# Altium PCB ciclo_V1.PcbDoc
Units mil, origin at the board's own origin, x right, y up, seen from the top; angles counter-clockwise.
Board outline 4270 x 2745 mil, 2 copper layers (Top Layer, Bottom Layer); 30 components, 33 nets, 131 pads, 0 vias.
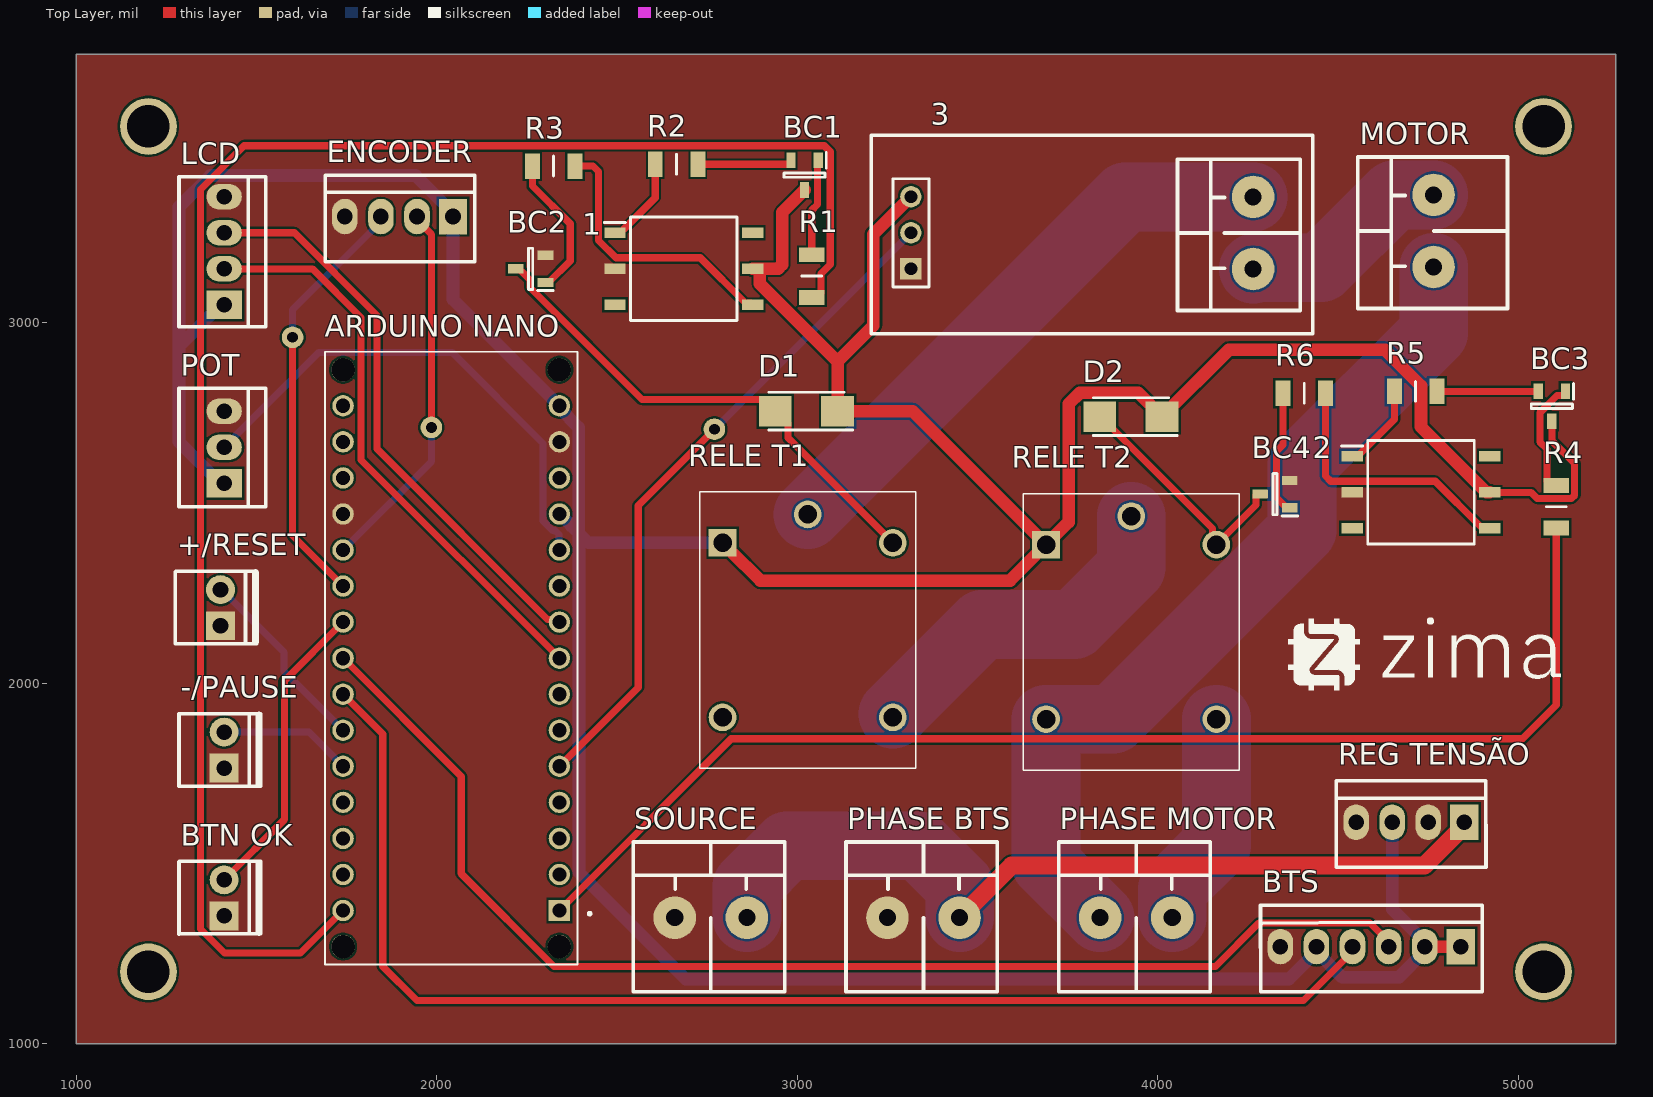
[diagram p0: Top Layer view]
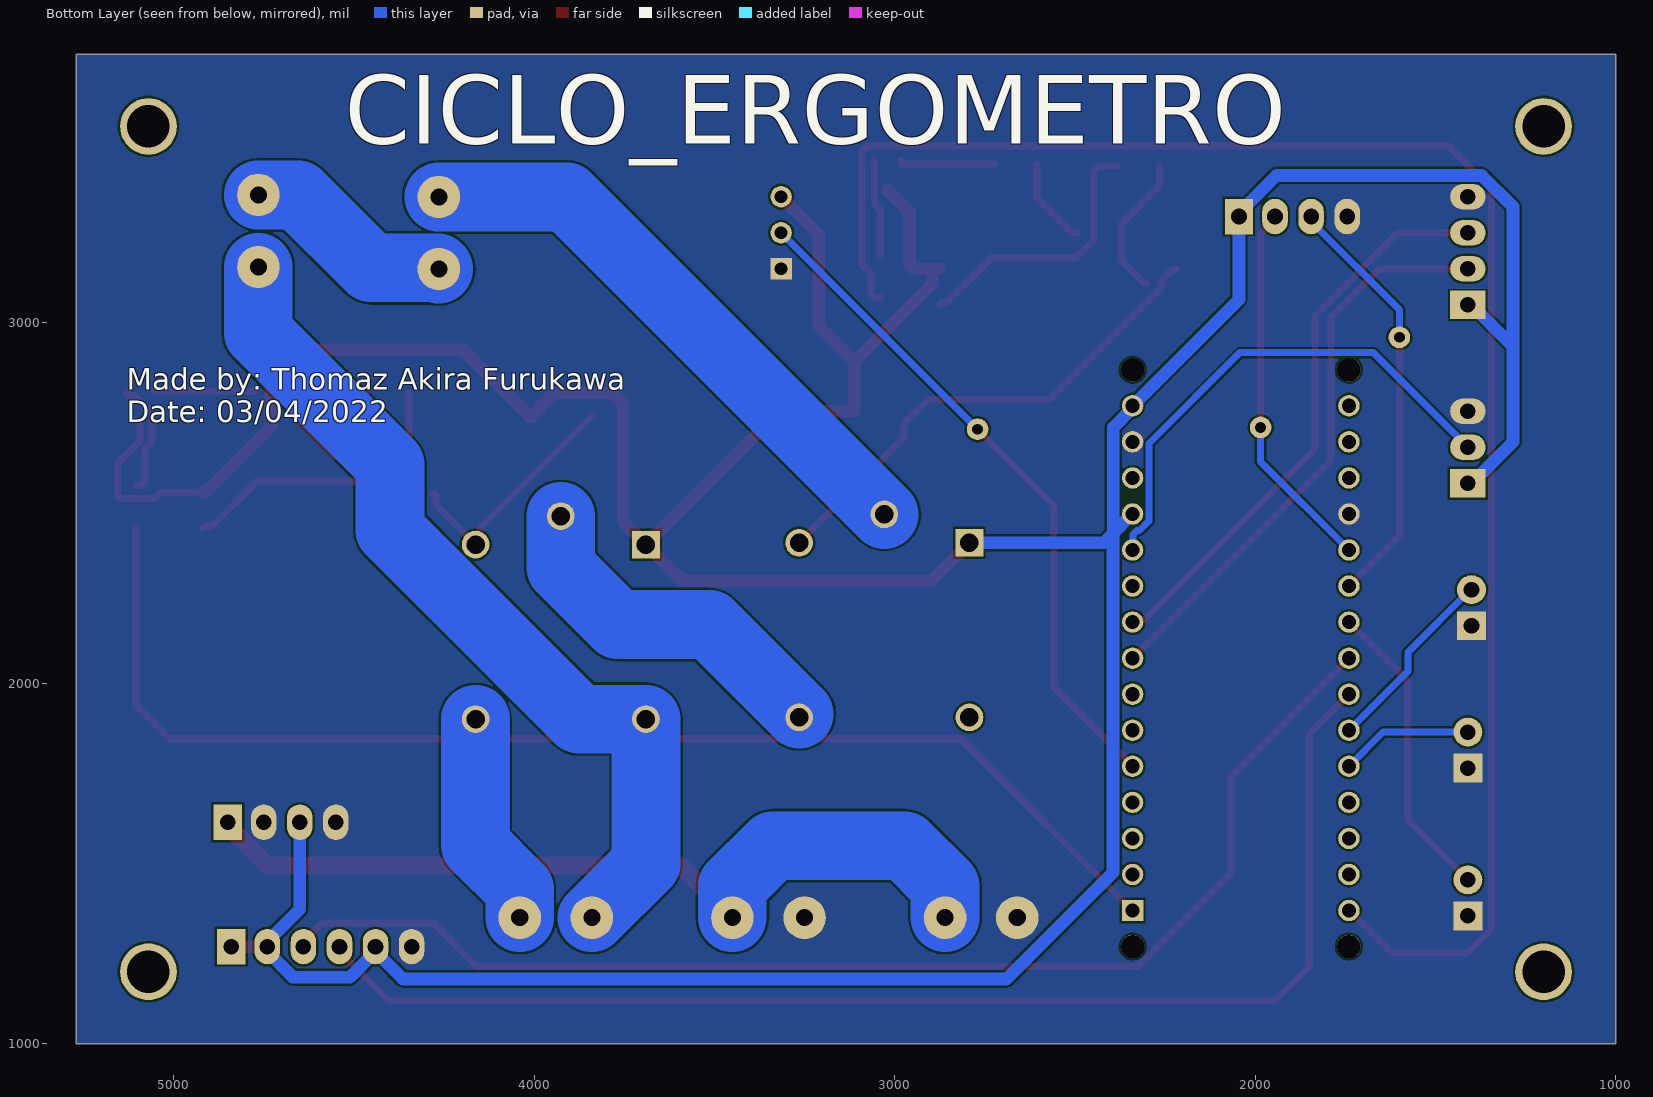
[diagram p1: Bottom Layer view, seen from below]
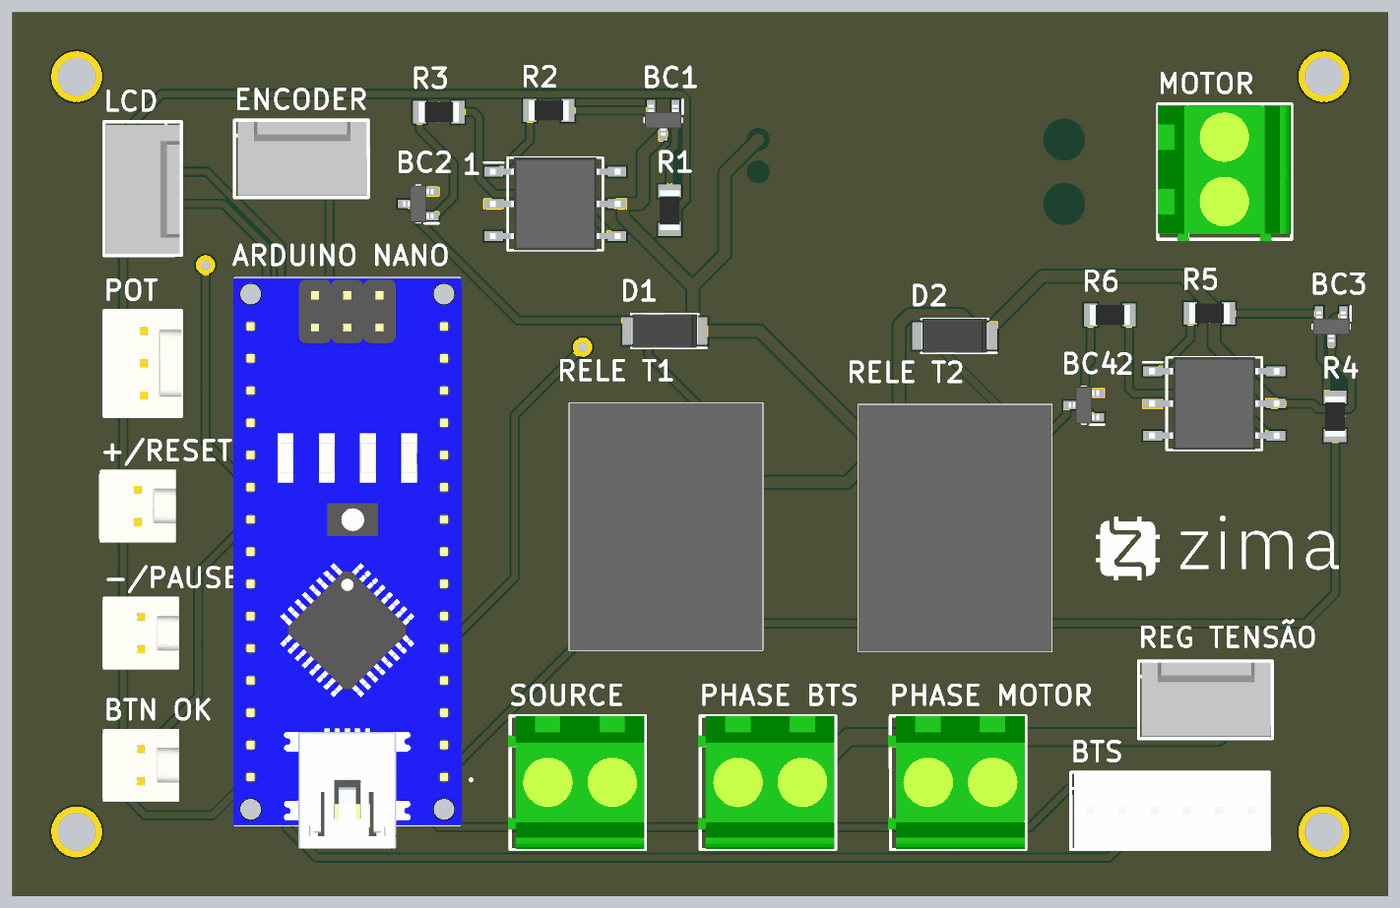
[diagram p2: 3D render of the assembled board from above, using the file's embedded part models]

## Layer stack, top to bottom
Top Solder: solder mask 0.4, Solder Resist, Dk 3.5
Top Layer: signal copper 1.4
Dielectric 1: dielectric 12.6, FR-4, Dk 4.8
Bottom Layer: signal copper 1.4
Bottom Solder: solder mask 0.4, Solder Resist, Dk 3.5

## Board outline
1000,1000 5270,1000 5270,3745 1000,3745

## Design rules (kind name [scope] priority, off if disabled: settings)
Clearance [All] p1: gap=5.98 ignorepadtopadclearanceinfootprint=FALSE except(0: Arc-Hole Track-Hole SMDPad-Hole THPad-Hole Via-Hole Fill-Hole Poly-Hole Region-Hole Text-Hole)
ComponentClearance [All] p1: gap=3.94 collisioncheckmode=3 verticalgap=3.94 showdistances=FALSE
HoleSize [All] p1: absolutevalues=TRUE maxlimit=190 minlimit=1 maxpercent=80.000 minpercent=20.000
MinimumSolderMaskSliver [All] p1: minsoldermaskwidth=3.94
PolygonConnect [All] p1: connectstyle=Direct reliefconductorwidth=10 reliefentries=4 polygonreliefangle="90 Angle" airgapwidth=10
RoutingVias [All] p1: holewidth=15.75 width=31.5 viastyle="Through Hole" minholewidth=11.81 minwidth=23.62 maxholewidth=19.68 maxwidth=39.37
SilkToSilkClearance [All] p1: silktosilkclearance=0
SilkToSolderMaskClearance [IsPad] p1: minsilkscreentomaskgap=0 clearancetoexposedcopper=TRUE
SolderMaskExpansion [All] p1: expansion=3.15 istentingtop=FALSE
Width [All] p1: maxlimit=190.69 minlimit=11.81 preferedwidth=19.68 minimp=50.000000 maximp=50.000000 favimp=50.000000
25 further rules are at their usual default settings.

## Components (designator, comment, footprint, x,y, rotation, side; value= is the part's Value field where it differs from the comment)
1 "4N25-X007T" SOP254P1030X440-6N 2685,3150 r0 top
2 "4N25-X007T" SOP254P1030X440-6N 4730,2530 r0 top
3 "ACS712" ACS712 21275,20890 r90 top
+/RESET "KK_2.54_2vias" KK_2VIAS_180º 1400,2160 r90 top
-/PAUSE "KK_2.54_2vias" KK_2VIAS_180º 1410,1765 r90 top
"ARDUINO NANO" "ABX00028" MODULE_A000005 2040,2070 r180 top (schematic designator "Arduino Nano")
BC1 "Trans BC817" SOT96P240X110-3N 3020,3410 r270 top
BC2 "Trans BC817" SOT96P240X110-3N 2260,3150 r180 top
BC3 "Trans BC817" SOT96P240X110-3N 5092.8,2768.66 r270 top
BC4 "Trans BC817" SOT96P240X110-3N 4325,2525 r180 top
"BTN OK" "KK_2.54_2vias" KK_2VIAS_180º 1410,1355 r90 top
BTS "KK_2.54_6vias" KK_6vias_180° 4840,1270 r180 top
D1 "1N4007 smd" DIOM5327X242N 3025,2755 r180 top
D2 "1N4007 smd" DIOM5327X242N 3925,2740 r180 top
ENCODER "KK_2.54_4vias" KK_4vias_180° 2045,3295 r180 top
LCD "KK_2.54_4vias" KK_4vias_180° 1410,3050 r90 top
MOTOR "KRE2vias" KRE2-2vias 4765,3255 r270 top
"PHASE BTS" "KRE2vias" KRE2-2vias 3350,1350 r180 top (schematic designator "FASE BTS")
"PHASE MOTOR" "KRE2vias" KRE2-2vias 3940,1350 r180 top (schematic designator "FASE MOTOR")
POT "KK_2.54_3vias" KK_3vias_180º 1410,2555 r90 top
R1 "1k" RESC3216X60N 3040,3130 r90 top
R2 "100R" RESC3216X60N 2665,3440 r0 top
R3 "1k" RESC3216X60N 2324.06,3435 r0 top
R4 "1k" RESC3216X60N 5105,2490 r90 top
R5 "100R" RESC3216X60N 4715,2810 r0 top
R6 "1k" RESC3216X60N 4405.94,2805 r0 top
"REG TENSÃO" "KK_2.54_4vias" KK_4vias_180° 4850,1615 r180 top
"RELE T1" "rele T73" JQC3FT731Z12VDC 2792.56,2390 r270 top
"RELE T2" "rele T73" JQC3FT731Z12VDC 3690,2385 r270 top
SOURCE "KRE2vias" KRE2-2vias 2760,1350 r180 top (schematic designator FONTE)

## Footprints (in the part's own frame and the unit in brackets; to place one, negate y for a bottom-side part, rotate by r counter-clockwise, add the part's x,y. Pads: shape width x height; smd on the part's side, far side on the other; paste and mask are expansions set on the pad)
ACS712 [mm]
  rect 1.5x1.5 hole 0.9: 1(-450.596,456.184)
  round 1.5 hole 0.9: 2(-448.056,456.184) 3(-445.516,456.184)
  round 3 hole 1.2: 4(-450.611,432.069) 5(-445.531,432.069)
  silkscreen extent -455.17,427.86 -441.2,458.98
DIOM5327X242N [mm]
  rect 2.3x2.15 smd: 1(-2.2,0) 2(2.2,0)
  silkscreen extent -3.27,-1.34 2.65,1.34, body extent -2.65,-1.33 2.65,1.34, height 2.42
JQC3FT731Z12VDC [mm]
  rect 1.95x1.95 hole 1.3: 1(0,0)
  round 1.95 hole 1.3: 2(-2,6) 3(0,12) 4(12.3,0) 5(12.3,12)
  silkscreen extent -3.6,-1.62 15.9,13.62, body extent -3.6,-1.62 15.9,13.62, height 15.6
KK_2VIAS_180º [mil]
  rect 80x80 hole 43.31: 1(0,0)
  round 80 hole 43.31: 2(100,0)
  silkscreen extent -50,-101 151,125, body extent -61,-108 165,128, height 468
KK_3vias_180º [mm]
  rect 2x2.5 hole 1.1: 1(0,0)
  oval 1.8x2.5 hole 1.1: 2(2.54,0) 3(5.08,0)
  silkscreen extent -1.65,-2.92 6.69,3.18, body extent -1.6,-2.95 6.69,3.05, height 11.9
KK_4vias_180° [mm]
  rect 2x2.5 hole 1.1: 1(0,0)
  oval 1.8x2.5 hole 1.1: 2(2.54,0) 3(5.08,0) 4(7.62,0)
  silkscreen extent -1.53,-2.92 9.02,3.18, body extent -1.4,-2.79 8.76,3.01, height 11.72
KK_6vias_180° [mm]
  rect 2x2.5 hole 1.1: 1(0,0)
  oval 1.8x2.5 hole 1.1: 2(2.54,0) 3(5.08,0) 4(7.62,0) 5(10.16,0) 6(12.7,0)
  silkscreen extent -1.53,-2.92 14.11,3.18, body extent -1.4,-2.79 13.84,3.05, height 11.7
KRE2-2vias [mm]
  round 3 hole 1.2: 1(-2.54,0) 2(2.54,0)
  silkscreen extent -5.21,-5.33 5.46,5.21, body extent -5.13,-5.33 5.63,5.17, height 14.35
MODULE_A000005 [mm]
  rect 1.508x1.508 hole 1: 1(-7.62,17.78)
  round 1.508 hole 1: 2(-7.62,15.24) 3(-7.62,12.7) 4(-7.62,10.16) 5(-7.62,7.62) 6(-7.62,5.08) 7(-7.62,2.54) 8(-7.62,0) 9(-7.62,-2.54) 10(-7.62,-5.08) 11(-7.62,-7.62) 12(-7.62,-10.16) 13(-7.62,-12.7) 14(-7.62,-15.24) 15(-7.62,-17.78) 16(7.62,-17.78) 17(7.62,-15.24) 18(7.62,-12.7) 19(7.62,-10.16) 20(7.62,-7.62) 21(7.62,-5.08) 22(7.62,-2.54) 23(7.62,0) 24(7.62,2.54) 25(7.62,5.08) 26(7.62,7.62) 27(7.62,10.16) 28(7.62,12.7) 29(7.62,15.24) 30(7.62,17.78)
  round 1.651 hole 1.651 unplated: ""(-7.62,20.32) ""(-7.62,-20.32) ""(7.62,20.32) ""(7.62,-20.32)
  silkscreen extent -9.85,-21.59 8.89,21.59, body extent -9,-21.6 9,23.4, height 18.7
RESC3216X60N [mm]
  rect 1.05x1.8 smd: 1(-1.5,0) 2(1.5,0)
  silkscreen extent 0,-0.7 0,0.7, body extent -1.58,-0.8 1.58,0.8, height 0.6
SOP254P1030X440-6N [mm]
  rect 1.5x0.75 smd: 1(-4.85,2.54) 2(-4.85,0) 3(-4.85,-2.54) 4(4.85,-2.54) 5(4.85,0) 6(4.85,2.54)
  silkscreen extent -5.6,-3.65 3.75,3.65, body extent -5.15,-3.65 5.15,3.65, height 4.4
SOT96P240X110-3N [mm]
  rect 1.1x0.65 smd: 1(-1.05,0.96) 2(-1.05,-0.96) 3(1.05,0)
  silkscreen extent -1.6,-1.45 0.15,1.54, body extent -1.2,-1.45 1.2,1.45, height 1.1

## Part data
1 2: "Phototransistor", Manufacturer_Name=Vishay, Mouser Part Number=782-4N25-X007T, Arrow Part Number=4N25-X007T, Arrow Price/Stock=https://www.arrow.com/en/products/4n25-x007t/vishay, Datasheet Link=https://eu.mouser.com/datasheet/2/427/4n25x000-1767213.pdf, Height=4.4mm, Manufacturer_Part_Number=4N25-X007T, Mouser Price/Stock=https://www.mouser.com/Search/Refine.aspx?Keyword=782-4N25-X007T
+/RESET -/PAUSE "BTN OK": "Conector KK 2.54mm 2 vias", Descrição="Conector KK 3 vias com passo 2.54mm", Encapsulamento="PTH - 180º", Modelo="2 vias - 180º", Valor="KK 2 vias 180º"
"ARDUINO NANO": "ATmega4809 Arduino Nano Every AVRÂ® AVR MCU 8-Bit Embedded Evaluation Board", Package=None, Availability="In Stock", Check_prices=https://www.snapeda.com/parts/ABX00028/Arduino/view-part/3656170/?ref=eda, MF=Arduino, MP=ABX00028, Price=None, Purchase-URL=https://pricing.snapeda.com/search/part/ABX00028/?ref=eda, SnapEDA_Link=https://www.snapeda.com/parts/ABX00028/Arduino/view-part/3656170/?ref=snap
BC1 BC2 BC3 BC4: "Transistor BJT NPN BC817-25-7-F", Arrow Part Number=BC817-25-7-F, Manufacturer_Name="Diodes Inc.", Mouser Part Number=621-BC817-25-7-F, Arrow Price/Stock=https://www.arrow.com/en/products/bc817-25-7-f/diodes-incorporated, Datasheet Link=https://www.diodes.com/assets/Datasheets/ds11107.pdf, Height=1.1mm, Manufacturer_Part_Number=BC817-25-7-F, Mouser Price/Stock=https://www.mouser.co.uk/ProductDetail/Diodes-Incorporated/BC817-25-7-F?qs=rGAXPo9uwV0jK0EyLZnqOw%3D%3D
BTS: "Conector KK 2.54mm 6 vias", Descrição="Conector KK 3 vias com passo 2.54mm", Encapsulamento="PTH - 180º", Modelo="3 vias - 180º", Valor="KK 6 vias 180º"
D1 D2: "Diode smd", Manufacturer_Name=Shikues, Manufacturer_Part_Number=1N4007, Datasheet Link=https://datasheet.lcsc.com/szlcsc/SK-1N4007_C126233.pdf, Height=2.42mm
ENCODER LCD "REG TENSÃO": "Conector KK 2.54mm 4 vias", Descrição="Conector KK 3 vias com passo 2.54mm", Encapsulamento="PTH - 180º", Modelo="3 vias - 180º", Valor="KK 4 vias 180º"
MOTOR "PHASE BTS" "PHASE MOTOR" SOURCE: "Conector 2 vias", Descrição="Conector KRE 2 vias 180º", Encapsulamento="PTH - 180º", Modelo="2 vias - 180º"
POT: "Conector KK 2.54mm 3 vias", Descrição="Conector KK 3 vias com passo 2.54mm", Encapsulamento="PTH - 180º", Modelo="3 vias - 180º", Valor="KK 3 vias 180º"
R1 R2 R3 R4 R5 R6: library part "RES 1206", "RES 1206 5%", Arrow Part Number=CRCW12064K70FKEA, Manufacturer_Name=Vishay, Mouser Part Number=71-CRCW1206-4.7K-E3, Arrow Price/Stock=https://www.arrow.com/en/products/crcw12064k70fkea/vishay, Datasheet Link=http://docs-emea.rs-online.com/webdocs/13ec/0900766b813ecc08.pdf, Height=0.6mm, Manufacturer_Part_Number=CRCW12064K70FKEA, Mouser Price/Stock=https://www.mouser.co.uk/ProductDetail/Vishay-Dale/CRCW12064K70FKEA?qs=1vm4qhDHCvlKJmatsKzyFQ%3D%3D
"RELE T1" "RELE T2": "Relay or Contactor", Manufacturer_Name=QIANJI, Manufacturer_Part_Number=JQC-3F-(T73)-1Z-12VDC, Datasheet Link=https://img.ozdisan.com/ETicaret_Dosya/341245_8627675.pdf, Height=15.5mm

## Free pads (board coordinates)
  round 157.48 hole 118.11: 1(1200,1200) 1(1200,3545) 1(5070,1200) 1(5070,3545)
  round 60 hole 30: 4(2770,2705) 6(1985,2710) 7(1600,2960)

## Nets (pads, with @x,y where several pads share a name; then routed paths per layer and width w, separated by ;. In a path a pad name is that pad's centre, name@x,y a point inside that pad or via, vN(x,y) a via of type N, cw(c..) or ccw(c..) an arc to the next point about the centre after c; other vN are vias at no path point)
+5V: 1.5 2.5 3.3 "ARDUINO NANO.12" "ARDUINO NANO.15" "REG TENSÃO.3" "RELE T1.1" "RELE T2.1" BC1.3 BC3.3 BTS.1 BTS.2 BTS.5 D1.1 D2.1 ENCODER.1 LCD.1 POT.1 | length 12836.1
  Top Layer w19.68: 2.5 5035.09,2530 5052.53,2512.56 5146.99,2512.56 5156.26,2521.83 5156.26,2609.54 5092.8,2673 BC3.3
  Top Layer w35: 2792.56,2390 2813.45,2369.11 2897.56,2285 3590,2285 3669.11,2364.11 3690,2385 ; 1.5 2946.28,3150 2957.82,3161.53 2957.82,3306.48 BC1.3 ; 1.5@2890.71,3150 2895.63,3145.08 2895.63,3109.37 3111.61,2893.39 ; 3.3 3211.01,3246.01 3211.01,2992.78 3111.61,2893.39 ; D2.1@4008.66,2740 3983.84,2764.82 3983.84,2767.78 3945.81,2805.81 3783.38,2805.81 3752.55,2774.97 3752.55,2447.55 3690,2385 ; D2.1 4196.61,2925 4630.26,2925 4729.9,2825.36 4729.9,2711.75 4911.65,2530 2.5 ; BTS.2 BTS.1 ; 3111.61,2893.39 D1.1 3320,2755 3690,2385
  Bottom Layer w19.68: BTS.2 BTS.2@4740,1283.78
  Bottom Layer w35: POT.1 1400.16,2555 1285,2670.16 1285,2934.84 ; LCD.1 1400.16,3050 1285,2934.84 ; 2336.96,2474.66 2373.33,2438.29 ; 2373.33,2436.67 2394.33,2415.67 ; 2393.17,2416.83 2393.17,2710.24 2340,2763.41 2340,2770 2045,3065 ENCODER.1 2045,3304.84 1940.93,3408.92 1371.82,3408.92 1285,3322.1 1285,2934.84 ; 2792.56,2390 2420,2390 2394.33,2415.67 ; BTS.5 BTS.5@4440,1256.22 ; 4650,1615 4650,1373.78 BTS.2@4740,1283.78 ; BTS.2 4740,1256.22 4668.78,1185 4511.22,1185 BTS.5@4440,1256.22 ; 2394.33,2415.67 2394.33,1475.67 2690,1180 4363.78,1180 BTS.5@4440,1256.22
+24V: "PHASE BTS.1" "REG TENSÃO.1" SOURCE.1 | length 2373.8
  Top Layer w50: 3450,1350 3594.73,1494.73 4739.57,1494.73 4835.63,1590.79 4850,1605.16 4850,1615
  Bottom Layer w190.69: SOURCE.1@2860.35,1350.35 2860.35,1438.3 2972.05,1550 3338.3,1550 3450.35,1437.95 3450.35,1350.35
+M: "PHASE MOTOR.1" "RELE T2.5" | length 601.3
  Bottom Layer w190.69: 4040,1350 4040,1429.29 4162.79,1552.09 4162.79,1900.39
+P: 3.4 MOTOR.1 | length 585.7
  Bottom Layer w190.69: 3.4 4267.75,3152.76 4452.76,3152.76 4655,3355 MOTOR.1
-M: "PHASE MOTOR.2" "RELE T2.4" MOTOR.2 | length 2421
  Bottom Layer w190.69: 3840,1350 3690,1500 3690,1900.75 3875.77,1900.75 4400,2424.98 4400,2607.13 4765.35,2972.49 MOTOR.2@4765.35,3154.65
A_phase: "ARDUINO NANO.20" ENCODER.2 pad.6 | length 1043.1
  Top Layer w19.68: ENCODER.2 1945,3285.66 1985,3245.66 pad.6
  Bottom Layer w19.68: 1740,2370 1985,2615 pad.6
B_phase: "ARDUINO NANO.21" ENCODER.3 pad.7 | length 1184.5
  Top Layer w19.68: pad.7 1600,2410 1740,2270
  Bottom Layer w19.68: pad.7 1600,3036.22 1845,3281.22 ENCODER.3
btn_+/rst: "ARDUINO NANO.25" +/RESET.2 | length 532.2
  Bottom Layer w19.68: +/RESET.2 1402.38,2260 1576.65,2085.73 1576.65,2033.35 1740,1870
btn_-/pse: "ARDUINO NANO.26" -/PAUSE.2 | length 369.4
  Bottom Layer w19.68: -/PAUSE.2 1645,1865 1740,1770
btn_ok: "ARDUINO NANO.22" "BTN OK.2" | length 851.7
  Top Layer w19.68: 1410,1455 1576.97,1621.97 1576.97,2006.97 1740,2170
COM_RELEY1: 3.5 "RELE T1.2" | length 1600.4
  Bottom Layer w190.69: 3028.78,2468.74 3909.47,3349.43 3.5
COM_RELEY2: "RELE T1.5" "RELE T2.2" | length 972
  Bottom Layer w190.69: 3265,1915 3513.07,2163.07 3768.07,2163.07 3926.22,2321.22 3926.22,2463.74
CURRENT_S: 3.2 "ARDUINO NANO.5" pad.4 | length 1883.9
  Top Layer w19.68: 2340,1770 2558.8,1988.8 2558.8,2493.8 pad.4
  Bottom Layer w19.68: pad.4 3.2
GND: 1.2 2.2 3.1 "ARDUINO NANO.14" "ARDUINO NANO.19" "BTN OK.1" "PHASE BTS.2" "REG TENSÃO.2" "REG TENSÃO.4" +/RESET.1 -/PAUSE.1 BC2.2 BC4.2 BTS.6 ENCODER.4 LCD.4 POT.3 SOURCE.2
LPWM: "ARDUINO NANO.24" BTS.4 | length 3600.1
  Top Layer w19.68: 1740,1970 1850,1860 1850,1215 1945,1120 4403.78,1120 4540,1256.22 BTS.4
Net1_1: 1.1 R2.1 | length 245
  Top Layer w19.68: 1.1 2508.82,3250 2605.94,3347.13 R2.1
Net1_4: 1.4 R3.2 | length 764.1
  Top Layer w19.68: R3.2 2433.31,3435 2448.7,3419.61 2448.7,3228.68 2496.79,3180.59 2730.59,3180.59 2856.26,3054.92 2871.02,3054.92 1.4
Net2_1: 2.1 R5.1 | length 237.1
  Top Layer w19.68: 2.1 4553.82,2630 4655.94,2732.13 R5.1
Net2_4: 2.4 R6.2 | length 746
  Top Layer w19.68: R6.2 4465,2575 4479.41,2560.59 4769.41,2560.59 4895.08,2434.92 4916.02,2434.92 2.4
NetBC1_1: BC1.1 R1.2 | length 269.7
  Top Layer w19.68: R1.2 3040,3312.28 3056.32,3328.6 3056.32,3449.86 BC1.1
NetBC1_2: BC1.2 R2.2 | length 267.8
  Top Layer w19.68: R2.2 2979.25,3440 2982.2,3442.95 BC1.2
NetBC2_1: BC2.1 R3.1 | length 399.9
  Top Layer w19.68: R3.1 2265,3380 2370,3275 2370,3172.01 2310.2,3112.2 BC2.1
NetBC2_3: "RELE T1.3" BC2.3 D1.2 | length 1397.5
  Top Layer w19.68: BC2.3 2227.52,3150 2258.31,3119.21 2258.31,3098.4 2569.23,2787.48 2905.91,2787.48 D1.2 2941.34,2755 2973.82,2722.52 2973.82,2681.18 3265,2390
NetBC3_1: BC3.1 R4.2 | length 330.1
  Top Layer w19.68: R4.2 5090.24,2549.06 5079.41,2559.88 5079.41,2650.09 5059.47,2670.03 5059.47,2750.83 5106.83,2798.19 5127.64,2798.19 5130.59,2801.14 BC3.1
NetBC3_2: BC3.2 R5.2 | length 280.9
  Top Layer w19.68: R5.2 BC3.2
NetBC4_1: BC4.1 R6.1 | length 346
  Top Layer w19.68: R6.1 4346.89,2662.05 4328.86,2644.02 4328.86,2515.83 4354.53,2490.16 4363.39,2490.16 BC4.1
NetBC4_3: "RELE T2.3" BC4.3 D2.2 | length 686.4
  Top Layer w19.68: D2.2 3841.34,2740 4151.52,2429.82 4151.52,2395.92 4162.44,2385 4271.85,2494.41 4271.85,2522.05 4274.8,2525 BC4.3
POT: "ARDUINO NANO.11" POT.2 | length 1416.1
  Bottom Layer w19.68: POT.2 1673.33,2918.33 2041.67,2918.33 2294.49,2665.51 2294.49,2451.15 2321.15,2424.49 2327.06,2424.49 2338.59,2412.96 2338.59,2371.41 2340,2370
RELE_1: "ARDUINO NANO.30" R1.1 | length 4762
  Top Layer w19.68: 1740,1370 1621.85,1251.85 1410.77,1251.85 1344.17,1318.44 1344.17,3370.45 1464.99,3491.26 3074.71,3491.26 3091.26,3474.71 3091.26,3161.83 3065.59,3136.16 3065.59,3081.77 3054.76,3070.94 R1.1
RELE_2: "ARDUINO NANO.1" R4.1 | length 3492
  Top Layer w19.68: 2340,1370 2816.54,1846.54 5011.54,1846.54 5105,1940 R4.1
RPWM: "ARDUINO NANO.23" BTS.3 | length 3497
  Top Layer w19.68: 1740,2070 2067.81,1742.19 2067.81,1472.19 2325,1215 4160,1215 4280.04,1335.04 4588.74,1335.04 4640,1283.78 BTS.3
SCL: "ARDUINO NANO.9" LCD.3 | length 1594.1
  Top Layer w19.68: LCD.3 1605,3250 1834.33,3020.67 1834.33,2650.67 2307.41,2177.59 2332.41,2177.59 2340,2170
SDA: "ARDUINO NANO.8" LCD.2 | length 1608.7
  Top Layer w19.68: LCD.2 1655,3150 1790,3015 1790,2620 2340,2070
pads on no net: 1.3 1.6 2.3 2.6 "ARDUINO NANO.2" "ARDUINO NANO.3" "ARDUINO NANO.4" "ARDUINO NANO.6" "ARDUINO NANO.7" "ARDUINO NANO.10" "ARDUINO NANO.13" "ARDUINO NANO.16" "ARDUINO NANO.17" "ARDUINO NANO.18" "ARDUINO NANO.27" "ARDUINO NANO.28" "ARDUINO NANO.29" "ARDUINO NANO." "RELE T1.4"

## Polygon pours and split planes (outlines as drawn)
GND on Top Layer "GND_L01_P000" (solid, pour order 0): 1000,3745 5270,3745 5270,1000 1000,1000
GND on Bottom Layer "GND_L02_P001" (solid, pour order 1): 1000,3745 5270,3745 5270,1000 1000,1000

## Silkscreen, mask and mechanical layers (free items; w line width, h text height)
Top Overlay:
  drawing of 7 lines, arcs and shapes, not listed
Bottom Overlay:
  text "CICLO_ERGOMETRO" at 4525,3496.66 h190
  text "Made by: Thomaz Akira Furukawa  / Date: 03/04/2022" at 5130,2725 h60